# Altium PCB BQ76930.PcbDoc
Units mil, origin at the board's own origin, x right, y up, seen from the top; angles counter-clockwise.
Board outline 3267.72 x 2480.32 mil, 2 copper layers (Top Layer, Bottom Layer); 119 components, 71 nets, 383 pads, 169 vias.
Unrouted connection lines stored in the file: 2.
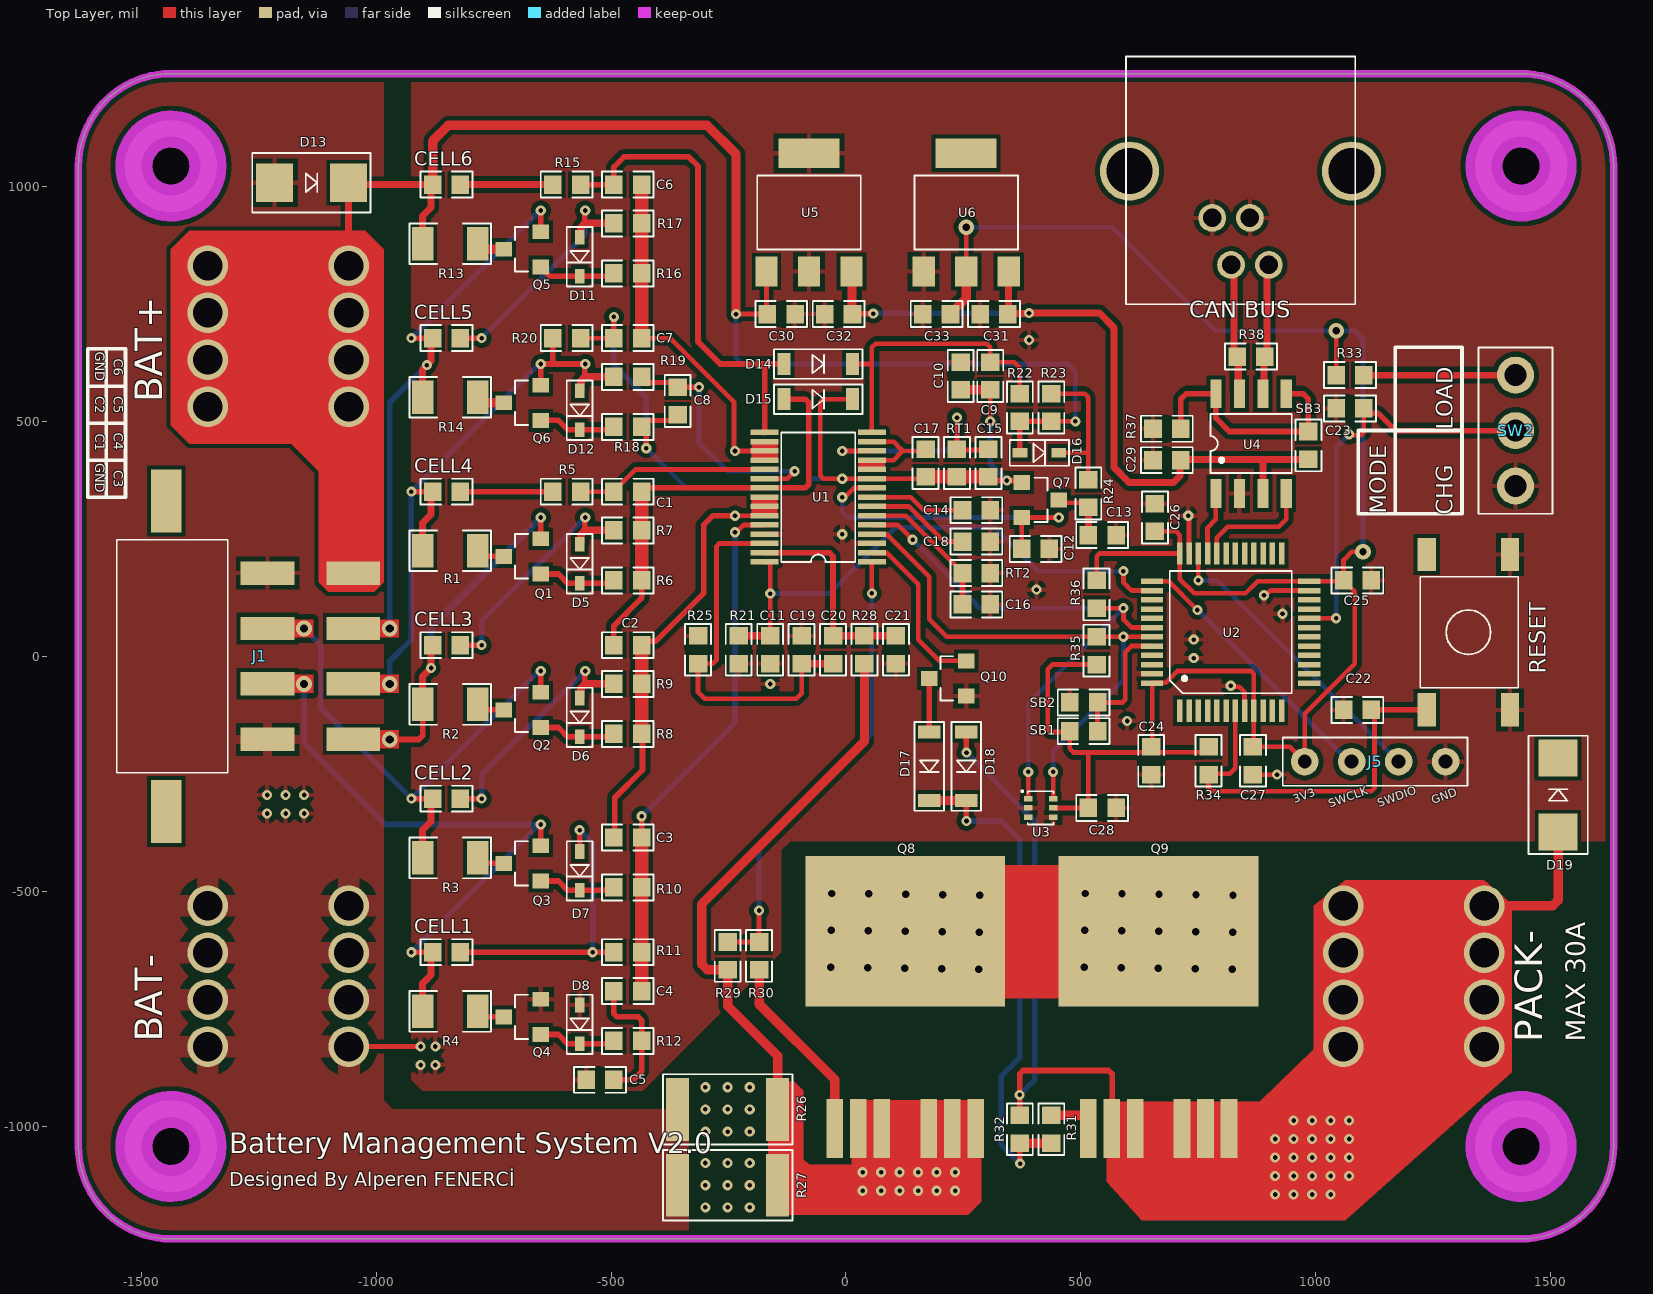
[diagram p0: Top Layer view]
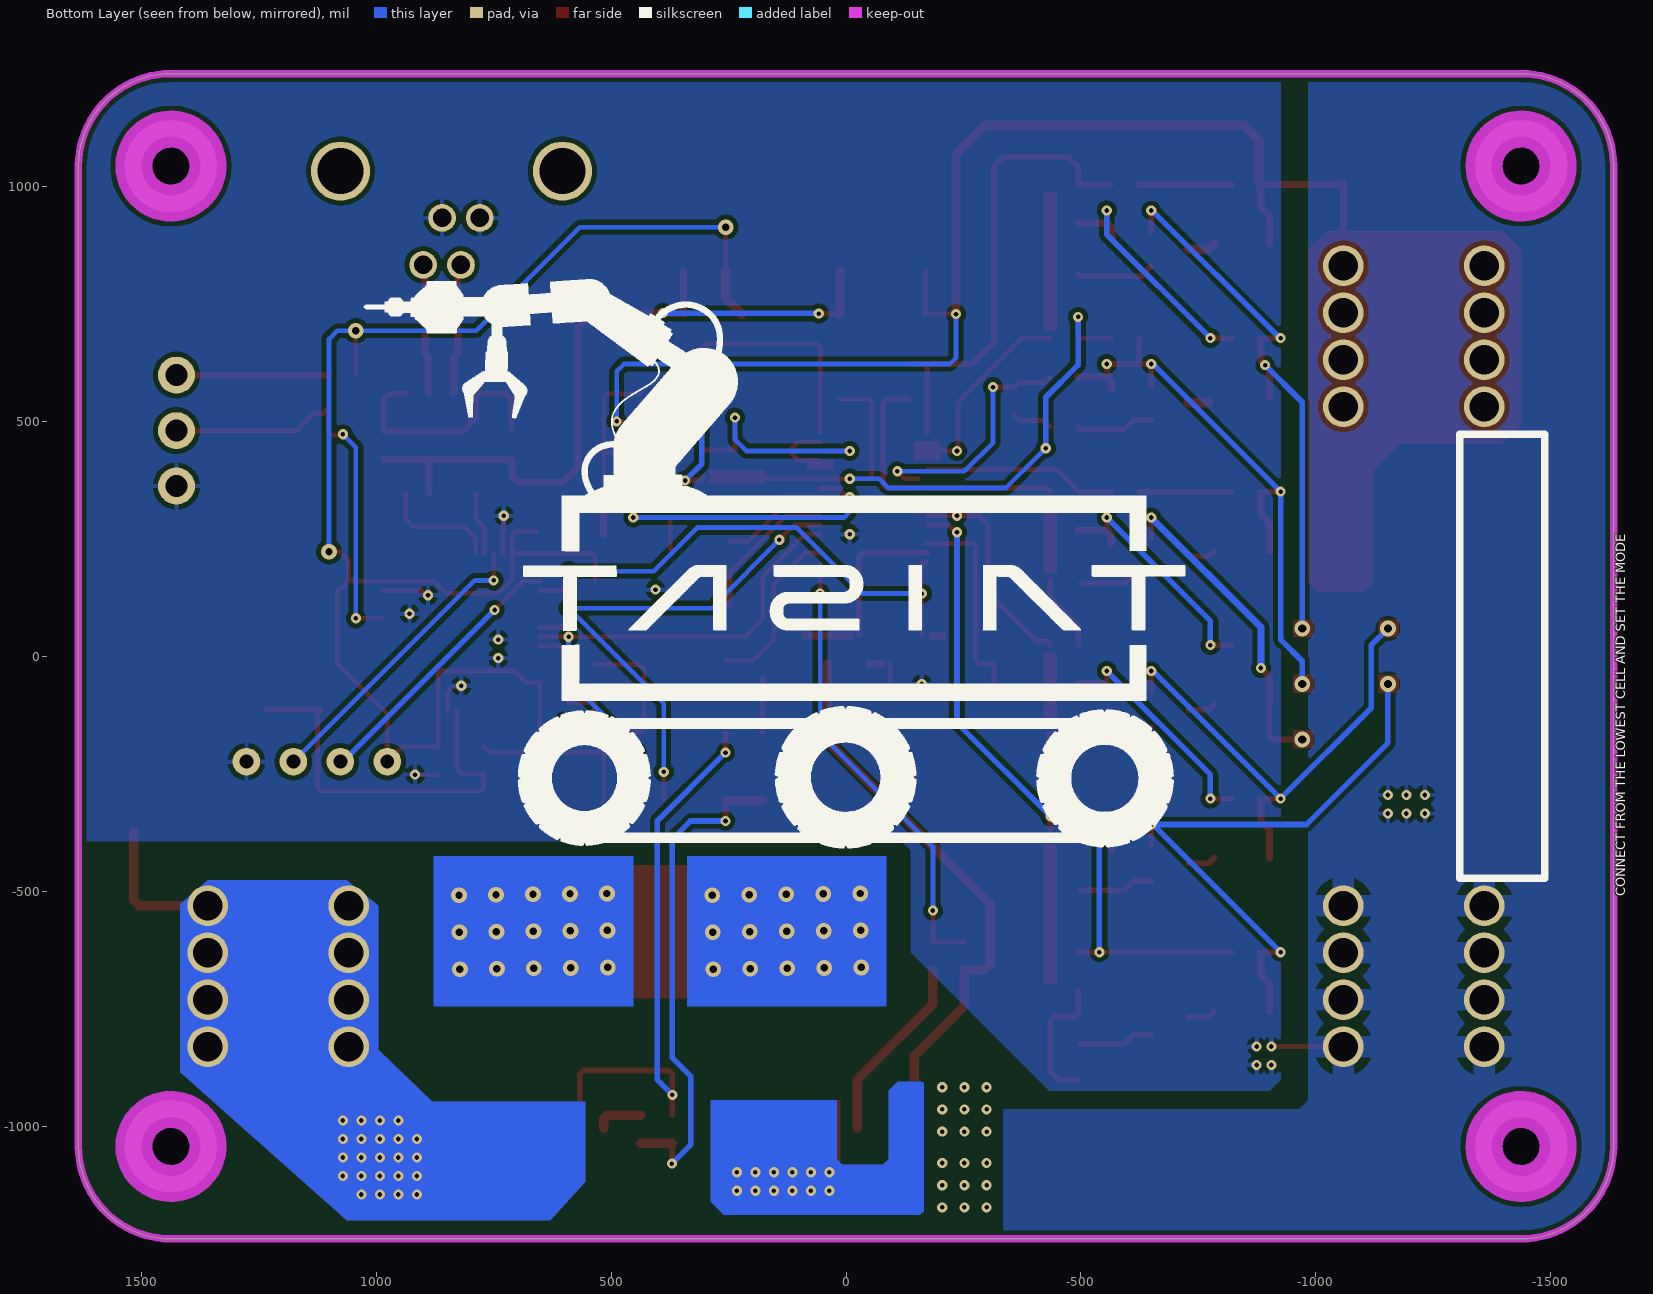
[diagram p1: Bottom Layer view, seen from below]
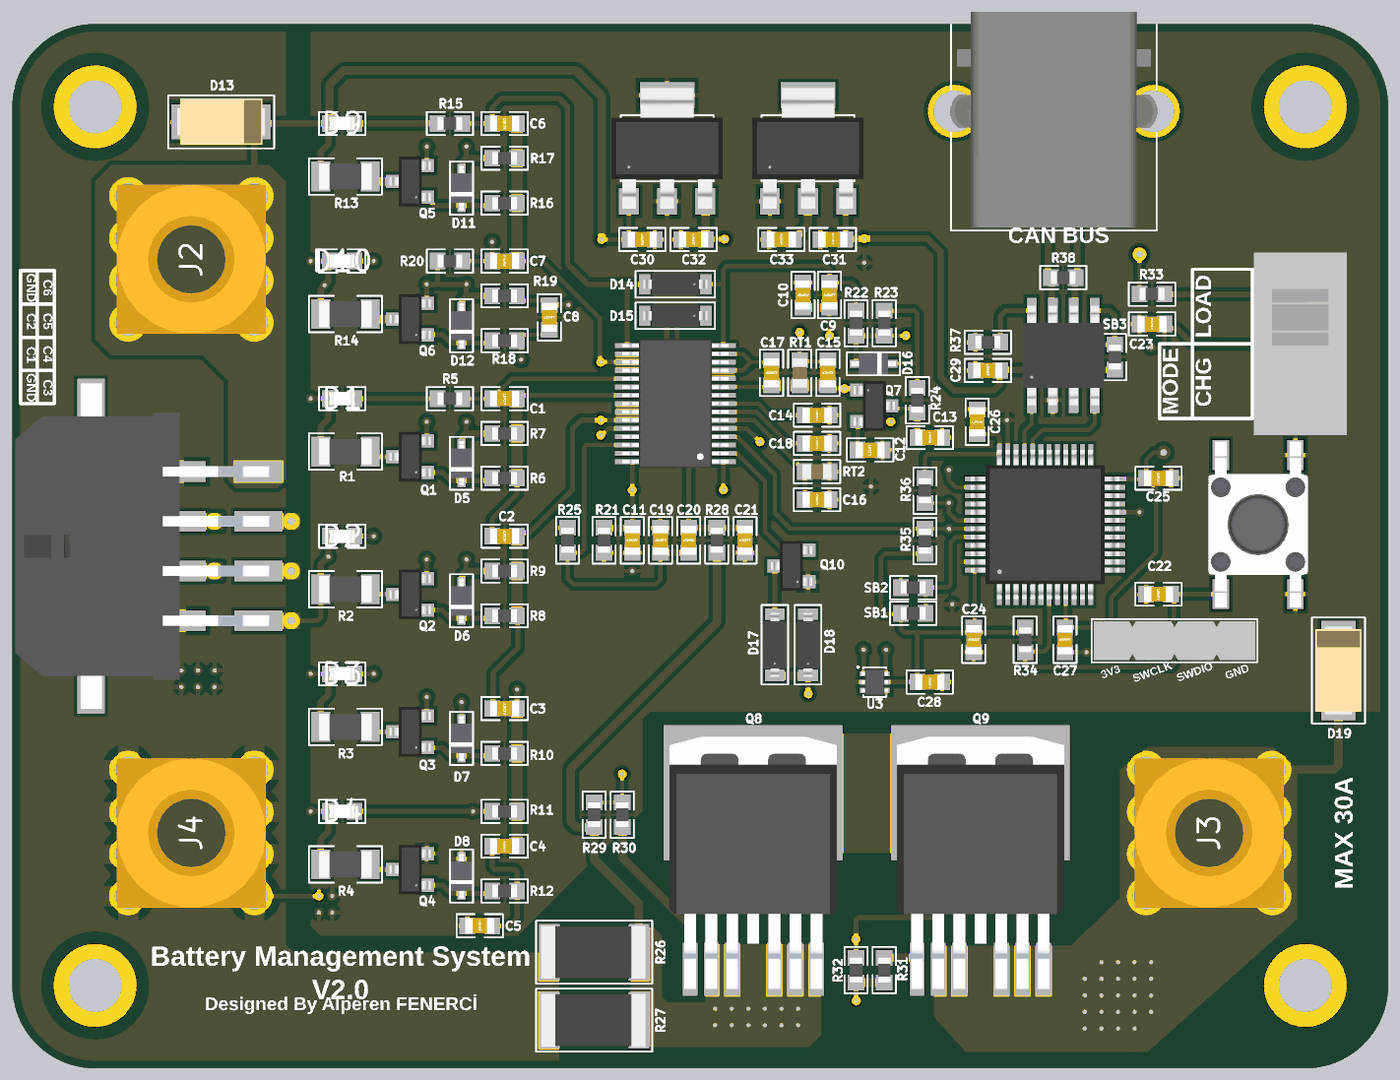
[diagram p2: 3D render of the assembled board from above, using the file's embedded part models]

## Layer stack, top to bottom
Top Solder: solder mask 0.4, Solder Resist, Dk 3.5
Top Layer: signal copper 1.4
Dielectric 1: dielectric 12.6, FR-4, Dk 4.8
Bottom Layer: signal copper 1.4
Bottom Solder: solder mask 0.4, Solder Resist, Dk 3.5

## Board outline
-1633.86,-1043.31 -1633.86,1043.31 cw(c-1437.01,1043.31) -1437.01,1240.16 1437.01,1240.16 cw(c1437.01,1043.31) 1633.86,1043.31 1633.86,-1043.31 cw(c1437.01,-1043.31) 1437.01,-1240.16 -1437.01,-1240.16 cw(c-1437.01,-1043.31)

## Design rules (kind name [scope] priority, off if disabled: settings)
Clearance [All] p1: gap=10 ignorepadtopadclearanceinfootprint=TRUE except(0: Arc-Hole Track-Hole SMDPad-Hole THPad-Hole Via-Hole Fill-Hole Poly-Hole Region-Hole Text-Hole; 8: Arc-Arc Arc-Track Arc-SMDPad Track-Track Track-SMDPad SMDPad-SMDPad SMDPad-Fill SMDPad-Poly SMDPad-Region)
DiffPairsRouting [All] p1: maxlimit=10 minlimit=10 mostfreqgap=10 toplayer_minwidth=15 toplayer_maxwidth=15 toplayer_prefwidth=15 bottomlayer_minwidth=15 bottomlayer_maxwidth=15 bottomlayer_prefwidth=15 maxuncoupledlength=500
PlaneConnect [All] p1: planeconnectstyle=Direct reliefexpansion=20 reliefentries=4 reliefconductorwidth=10 reliefairgap=10
PolygonConnect [All] p1: connectstyle=Relief reliefconductorwidth=10 reliefentries=4 polygonreliefangle="90 Angle" airgapwidth=10
RoutingVias [All] p1: holewidth=28 width=50 viastyle="Through Hole" minholewidth=28 minwidth=50 maxholewidth=28 maxwidth=50
SolderMaskExpansion [All] p1: expansion=4 istentingtop=FALSE
Width [All] p1: maxlimit=50 minlimit=10 preferedwidth=12 minimp=50.000000 maximp=50.000000 favimp=50.000000
28 further rules are at their usual default settings.

## Classes and differential pairs
component class TopLevel: BAT+ BAT- J1 PACK-
component class "Power Management": C29 C31 C33 U5 U6
component class FET: C19 C21 D15 D16 D19 Q7 Q9 R25 R26 R27 R28 R29 R30 R31
component class BMS: C1 C2 C3 C4 C5 C7 C9 C11 C13 C15 C17 CELL1 CELL2 CELL3 CELL4 CELL5 CELL6 D5 D6 D7 D8 D11 D13 D14 D15 Q1 Q2 Q3 Q4 R1 R2 R3 R4 R5 R6 R7 R8 R9 R10 R11 R12 R15 R19 R21 RT1 RT2 U1
component class Misc: C27 C29 "CAN BUS" R35 R37 SB3 U3 U4
component class MCU: C21 C23 C25 C27 J5 R31 R33 R35 RESET SB1 SB2 SW2 U2
differential pair CAN: +CAN_P -CAN_N

## Components (designator, comment, footprint, x,y, rotation, side; value= is the part's Value field where it differs from the comment)
BAT+ "7460305" 7460305 -1208.66,681.1 r90 top (schematic designator J2)
BAT- "7460305" 7460305 -1208.66,-681.1 r90 top (schematic designator J4)
C1 "CAP 0603" "CAP 0603" -464.57,350.39 r0 top value=10nF
C2 "CAP 0603" "CAP 0603" -464.57,23.62 r0 top value=10nF
C3 "CAP 0603" "CAP 0603" -464.57,-385.83 r0 top value=10nF
C4 "CAP 0603" "CAP 0603" -464.57,-712.6 r180 top value=10nF
C5 "CAP 0603" "CAP 0603" -523.62,-901.57 r180 top value=10nF
C6 "CAP 0603" "CAP 0603" -464.57,1003.94 r0 top value=10nF
C7 "CAP 0603" "CAP 0603" -464.57,677.17 r180 top value=10nF
C8 "CAP 0603" "CAP 0603" -358.27,543.31 r270 top value=10nF
C9 "CAP 0603" "CAP 0603" 307.09,596.46 r270 top value=10nF
C10 "CAP 0603" "CAP 0603" 244.09,596.46 r90 top value=10nF
C11 "CAP 0603" "CAP 0603" -161.42,13.78 r270 top value=10nF
C12 "CAP 0603" "CAP 0603" 403.54,228.35 r0 top value=10nF
C13 "CAP 0603" "CAP 0603" 545.28,257.87 r0 top value=10nF
C14 "CAP 0603" "CAP 0603" 277.56,311.02 r0 top value=10nF
C15 "CAP 0603" "CAP 0603" 303.15,411.42 r270 top value=10nF
C16 "CAP 0603" "CAP 0603" 277.56,110.24 r0 top value=10nF
C17 "CAP 0603" "CAP 0603" 169.29,411.42 r270 top value=10nF
C18 "CAP 0603" "CAP 0603" 277.56,244.1 r0 top value=10nF
C19 "CAP 0603" "CAP 0603" -94.49,13.78 r90 top value=10nF
C20 "CAP 0603" "CAP 0603" -27.56,13.78 r90 top value=10nF
C21 "CAP 0603" "CAP 0603" 106.3,13.78 r270 top value=10nF
C22 "CAP 0603" "CAP 0603" 1088.58,-114.17 r180 top value=10nF
C23 "CAP 0603" "CAP 0603" 1072.83,527.56 r180 top value=10nF
C24 "CAP 0603" "CAP 0603" 649.61,-222.44 r270 top value=10nF
C25 "CAP 0603" "CAP 0603" 1088.58,161.42 r0 top value=10nF
C26 "CAP 0603" "CAP 0603" 657.48,295.28 r90 top value=10nF
C27 "CAP 0603" "CAP 0603" 866.14,-222.44 r270 top value=10nF
C28 "CAP 0603" "CAP 0603" 545.28,-322.83 r0 top value=10nF
C29 "CAP 0603" "CAP 0603" 683.07,417.32 r180 top value=10nF
C30 "CAP 0603" "CAP 0603" -137.8,728.35 r0 top value=10nF
C31 "CAP 0603" "CAP 0603" 314.96,728.35 r180 top value=10nF
C32 "CAP 0603" "CAP 0603" -15.75,728.35 r180 top value=10nF
C33 "CAP 0603" "CAP 0603" 192.91,728.35 r180 top value=10nF
"CAN BUS" "DS1133-03-S60BX" RJ6P4C 839.76,883.07 r180 top (schematic designator RJ1)
CELL1 "LTW-C191TLA" "LED 0603" -850.39,-629.92 r180 top (schematic designator D4)
CELL2 "LTW-C191TLA" "LED 0603" -850.39,-303.15 r180 top (schematic designator D3)
CELL3 "LTW-C191TLA" "LED 0603" -850.39,23.62 r180 top (schematic designator D2)
CELL4 "LTW-C191TLA" "LED 0603" -850.39,350.39 r180 top (schematic designator D1)
CELL5 "LTW-C191TLA" "LED 0603" -850.39,677.17 r180 top (schematic designator D10)
CELL6 "LTW-C191TLA" "LED 0603" -850.39,1003.94 r180 top (schematic designator D9)
D5 "MM3Z5V1T1G" SOD323 -566.93,196.85 r90 top
D6 "MM3Z5V1T1G" SOD323 -566.93,-129.92 r90 top
D7 "MM3Z5V1T1G" SOD323 -566.93,-456.69 r90 top
D8 "MM3Z5V1T1G" SOD323 -566.93,-783.46 r90 top
D11 "MM3Z5V1T1G" SOD323 -566.93,850.39 r90 top
D12 "MM3Z5V1T1G" SOD323 -566.93,523.62 r90 top
D13 "SMAJ36A-HT" DO214AC -1137.8,1007.87 r180 top
D14 "BAV20W-7-F" SOD123 -59.06,622.05 r180 top
D15 "BAV20W-7-F" SOD123 -59.06,547.24 r180 top
D16 "1N4148WS" SOD323 411.42,433.07 r180 top
D17 "1N4007W" SOD123 177.17,-234.25 r90 top
D18 "MMSZ36V-HT" SOD123 255.91,-234.25 r90 top
D19 "US1D_R1" DO214AC 1515.75,-295.28 r270 top
J1 "HEADER-MALE-SMT-90C-4COL-2ROW" 0430450810 -1248.03,0 r270 top
J5 "146285-4" HMATHT00C41 1126.38,-224.41 r0 top
PACK- "7460305" 7460305 1208.66,-681.1 r90 top (schematic designator J3)
Q1 "2N7002K" SOT23-3 -688.98,212.6 r90 top
Q2 "2N7002K" SOT23-3 -688.98,-114.17 r90 top
Q3 "2N7002K" SOT23-3 -688.98,-440.94 r90 top
Q4 "2N7002K" SOT23-3 -688.98,-767.72 r90 top
Q5 "2N7002K" SOT23-3 -688.98,866.14 r90 top
Q6 "2N7002K" SOT23-3 -688.98,539.37 r90 top
Q7 "2N7002K" SOT23-3 413.39,332.68 r270 top
Q8 "IRF2804STRL" D2PAK-7 125.98,-795.28 r0 top
Q9 "IRF2804STRL" D2PAK-7 665.35,-795.28 r0 top
Q10 "PJA3441" SOT23-3 216.54,-47.24 r90 top
R1 "RES 1206" "RESISTOR 1206" -842.52,224.41 r180 top value=4.7kR
R2 "RES 1206" "RESISTOR 1206" -842.52,-102.36 r180 top value=4.7kR
R3 "RES 1206" "RESISTOR 1206" -842.52,-429.13 r180 top value=4.7kR
R4 "RES 1206" "RESISTOR 1206" -842.52,-755.9 r180 top value=4.7kR
R5 "RES 0603" "RESISTOR 0603" -594.49,350.39 r180 top value=1kR
R6 "RES 0603" "RESISTOR 0603" -464.57,161.42 r180 top value=1kR
R7 "RES 0603" "RESISTOR 0603" -464.57,267.72 r180 top value=1kR
R8 "RES 0603" "RESISTOR 0603" -464.57,-165.35 r180 top value=1kR
R9 "RES 0603" "RESISTOR 0603" -464.57,-59.05 r180 top value=1kR
R10 "RES 0603" "RESISTOR 0603" -464.57,-492.13 r180 top value=1kR
R11 "RES 0603" "RESISTOR 0603" -464.57,-629.92 r180 top value=1kR
R12 "RES 0603" "RESISTOR 0603" -464.57,-818.9 r180 top value=1kR
R13 "RES 1206" "RESISTOR 1206" -842.52,877.95 r180 top value=4.7kR
R14 "RES 1206" "RESISTOR 1206" -842.52,551.18 r180 top value=4.7kR
R15 "RES 0603" "RESISTOR 0603" -594.49,1003.94 r180 top value=1kR
R16 "RES 0603" "RESISTOR 0603" -464.57,814.96 r180 top value=1kR
R17 "RES 0603" "RESISTOR 0603" -464.57,921.26 r180 top value=1kR
R18 "RES 0603" "RESISTOR 0603" -464.57,488.19 r180 top value=1kR
R19 "RES 0603" "RESISTOR 0603" -464.57,594.49 r180 top value=1kR
R20 "RES 0603" "RESISTOR 0603" -594.49,677.17 r180 top value=1kR
R21 "RES 0603" "RESISTOR 0603" -228.35,13.78 r90 top value=1kR
R22 "RES 0603" "RESISTOR 0603" 370.08,529.53 r90 top value=1kR
R23 "RES 0603" "RESISTOR 0603" 437.01,529.53 r270 top value=1kR
R24 "RES 0603" "RESISTOR 0603" 515.75,346.46 r90 top value=1kR
R25 "RES 0603" "RESISTOR 0603" -314.96,13.78 r270 top value=1kR
R26 "RES 2512" "RESISTOR 2512" -251.97,-964.57 r0 top value=4.7kR
R27 "RES 2512" "RESISTOR 2512" -251.97,-1125.98 r0 top value=4.7kR
R28 "RES 0603" "RESISTOR 0603" 39.37,13.78 r90 top value=1kR
R29 "RES 0603" "RESISTOR 0603" -251.97,-637.8 r90 top value=1kR
R30 "RES 0603" "RESISTOR 0603" -185.04,-637.8 r90 top value=1kR
R31 "RES 0603" "RESISTOR 0603" 437.01,-1006.89 r270 top value=1kR
R32 "RES 0603" "RESISTOR 0603" 370.08,-1006.89 r270 top value=1kR
R33 "RES 0603" "RESISTOR 0603" 1072.83,598.43 r180 top value=1kR
R34 "RES 0603" "RESISTOR 0603" 771.65,-222.44 r90 top value=1kR
R35 "RES 0603" "RESISTOR 0603" 533.46,11.81 r270 top value=1kR
R36 "RES 0603" "RESISTOR 0603" 533.46,131.89 r90 top value=1kR
R37 "RES 0603" "RESISTOR 0603" 683.07,484.25 r0 top value=1kR
R38 "RES 0603" "RESISTOR 0603" 862.2,637.8 r0 top value=1kR
RESET "DS1042-03" SWITCH-6X6 1324.8,51.18 r90 top (schematic designator SW1)
RT1 "NTC 0603" "NTC 0603" 236.22,411.42 r90 top value=10kR
RT2 "NTC 0603" "NTC 0603" 277.56,177.17 r180 top value=10kR
SB1 "RES 0603" "RESISTOR 0603" 505.91,-159.45 r180 top value=1kR
SB2 "RES 0603" "RESISTOR 0603" 505.91,-98.43 r0 top value=1kR
SB3 "RES 0603" "RESISTOR 0603" 984.25,448.82 r270 top value=1kR
SW2 "L-KLS7-SS-12F20A" SPDT 1425.2,480.32 r270 top
U1 "BQ76930" TSSOP-30 -59.06,338.58 r180 top
U2 "STM32F072C8" LQFP48 818.9,51.18 r0 top
U3 "TMP112AIDRLT" SOT563 414.37,-322.83 r0 top
U4 "MCP2551T-I" SOIC-8 862.2,452.76 r90 top
U5 "LM7805MPX" SOT223-3 -78.74,944.88 r0 top
U6 "LD1117AS33" SOT223-3 255.91,944.88 r0 top

## Footprints (in the part's own frame and the unit in brackets; to place one, negate y for a bottom-side part, rotate by r counter-clockwise, add the part's x,y. Pads: shape width x height; smd on the part's side, far side on the other; paste and mask are expansions set on the pad)
7460305 [mm]
  round 2.2 hole 1.6 mask+0.05: 1(-3.81,-3.81) 1(-3.81,3.81) 1(-1.27,3.81) 1(-1.27,-3.81) 1(1.27,3.81) 1(1.27,-3.81) 1(3.81,-3.81) 1(3.81,3.81)
  body extent -4.5,-4.5 4.5,4.5, height 7
0430450810 [mm]
  rect 1.27x2.9 smd mask+0.05: 1(-4.5,5.055) 2(-1.5,5.055) 3(1.5,5.055) 4(4.5,5.055) 5(-4.5,0.425) 6(-1.5,0.425) 7(1.5,0.425) 8(4.5,0.425)
  rect 3.4x1.65 smd mask+0.05: ""(-8.4,-5.055) ""(8.4,-5.055)
  silkscreen extent -6.3,-7.73 6.3,-1.73, body extent -9.82,-9.62 9.82,5.77, height 8.77
"CAP 0603" [mm]
  rect 0.95x1 smd mask+0.05: 1(-0.75,0) 2(0.75,0)
  silkscreen extent -1.4,-0.7 1.4,0.7, body extent -0.88,-0.47 0.88,0.48, height 0.95
D2PAK-7 [mm] "TO-263-7"
  rect 0.9x3.2 smd mask+0.05: 1(-3.81,-5.325) 2(-2.54,-5.325) 2(-1.27,-5.325) 2(1.27,-5.325) 2(2.54,-5.325) 2(3.81,-5.325)
  rect 10.8x8.15 smd mask+0.05: 3(0,5.325)
  body extent -5.05,-6.54 5.05,8.7, height 4.88
DO214AC [mm] "SMA"
  rect 2x2.1 smd mask+0.05: 1(-2,0) 2(2,0)
  silkscreen extent -3.2,-1.6 3.2,1.6, body extent -2.64,-1.4 2.64,1.4, height 2.34
HMATHT00C41 [mm]
  round 1.5 hole 0.75 mask+0.05: 1(-3.81,0) 2(-1.27,0) 3(1.27,0) 4(3.81,0)
  silkscreen extent -5,-1.3 5,1.3, body extent -4.88,-1.17 4.88,1.17, height 4.58
"LED 0603" [mm]
  rect 0.95x1 smd mask+0.05: 1(-0.75,0) 2(0.75,0)
  silkscreen extent -1.4,-0.7 1.4,0.7, body extent -0.8,-0.4 0.8,0.4, height 0.65
LQFP48 [mm]
  rect 0.3x1.2 smd mask+0.05: 1(-2.75,-4.25) 2(-2.25,-4.25) 3(-1.75,-4.25) 4(-1.25,-4.25) 5(-0.75,-4.25) 6(-0.25,-4.25) 7(0.25,-4.25) 8(0.75,-4.25) 9(1.25,-4.25) 10(1.75,-4.25) 11(2.25,-4.25) 12(2.75,-4.25) 25(2.75,4.25) 26(2.25,4.25) 27(1.75,4.25) 28(1.25,4.25) 29(0.75,4.25) 30(0.25,4.25) 31(-0.25,4.25) 32(-0.75,4.25) 33(-1.25,4.25) 34(-1.75,4.25) 35(-2.25,4.25) 36(-2.75,4.25)
  rect 1.2x0.3 smd mask+0.05: 13(4.25,-2.75) 14(4.25,-2.25) 15(4.25,-1.75) 16(4.25,-1.25) 17(4.25,-0.75) 18(4.25,-0.25) 19(4.25,0.25) 20(4.25,0.75) 21(4.25,1.25) 22(4.25,1.75) 23(4.25,2.25) 24(4.25,2.75) 37(-4.25,2.75) 38(-4.25,2.25) 39(-4.25,1.75) 40(-4.25,1.25) 41(-4.25,0.75) 42(-4.25,0.25) 43(-4.25,-0.25) 44(-4.25,-0.75) 45(-4.25,-1.25) 46(-4.25,-1.75) 47(-4.25,-2.25) 48(-4.25,-2.75)
  silkscreen extent -3.3,-3.3 3.3,3.3, body extent -4.5,-4.5 4.5,4.5, height 1.6
"NTC 0603" [mm]
  rect 0.95x1 smd mask+0.05: 1(-0.75,0) 2(0.75,0)
  silkscreen extent -1.4,-0.7 1.4,0.7, body extent -0.88,-0.44 0.88,0.44, height 0.89
"RESISTOR 0603" [mm]
  rect 0.95x1 smd mask+0.05: 1(-0.75,0) 2(0.75,0)
  silkscreen extent -1.4,-0.7 1.4,0.7, body extent -0.76,-0.38 0.76,0.38, height 0.36
"RESISTOR 1206" [mm]
  rect 1.15x1.8 smd mask+0.05: 1(-1.49,0) 2(1.49,0)
  silkscreen extent -2.2,-1.1 2.2,1.1, body extent -1.6,-0.8 1.6,0.8, height 0.64
"RESISTOR 2512" [mm]
  rect 1.25x3.4 smd mask+0.05: 1(-2.7,0) 2(2.7,0)
  silkscreen extent -3.5,-1.9 3.5,1.9, body extent -3.2,-1.6 3.1,1.6, height 0.71
RJ6P4C [mm]
  round 1.5 hole 1 mask+0.05: 1(-1.53,1.27) 2(-0.51,-1.27) 3(0.51,1.27) 4(1.53,-1.27)
  round 3.2 hole 2.5 mask+0.05: ""(-6,-3.8) ""(6,-3.8)
  silkscreen extent -6.2,-10 6.2,3.4, body extent -6.24,-9.8 6.24,3.2, height 14.5
SOD123 [mm]
  rect 0.7x1.2 smd mask+0.05: 1(-1.85,0) 2(1.85,0)
  silkscreen extent -2.4,-0.8 2.4,0.8, body extent -1.92,-0.67 1.92,0.67, height 0.81
SOD323 [mm]
  rect 0.8x0.5 smd mask+0.05: 1(-1.05,0) 2(1.05,0)
  silkscreen extent -1.6,-0.7 1.6,0.7, body extent -1.34,-0.65 1.34,0.65, height 0.94
SOIC-8 [mm]
  rect 1.55x0.6 smd mask+0.05: 1(-2.7,1.905) 2(-2.7,0.635) 3(-2.7,-0.635) 4(-2.7,-1.905) 5(2.7,-1.905) 6(2.7,-0.635) 7(2.7,0.635) 8(2.7,1.905)
  silkscreen extent -1.6,-2.2 1.6,2.2, body extent -3,-2.45 3,2.45, height 1.76
SOT23-3 [mm]
  rect 0.8x0.9 smd mask+0.05: 1(-0.95,-1) 2(0.95,-1) 3(0,1)
  silkscreen extent -1.2,-0.3 1.2,0.4, body extent -1.5,-1.24 1.5,1.24, height 1.17
SOT223-3 [mm]
  rect 1.2x1.6 smd mask+0.05: 1(-2.3,-3.2) 2(0,-3.2) 3(2.3,-3.2)
  rect 3.3x1.6 smd mask+0.05: 2(0,3.2)
  silkscreen extent -2.8,-2 2.8,2, body extent -3.35,-3.64 3.35,3.64, height 1.81
SOT563 [mm]
  rect 0.45x0.3 smd mask+0.05: 1(-0.675,0.5) 2(-0.675,0) 3(-0.675,-0.5) 4(0.675,-0.5) 5(0.675,0) 6(0.675,0.5)
  silkscreen extent -1.05,-0.9 0.7,0.95, body extent -0.8,-0.8 0.8,0.8, height 0.6
SPDT [mm]
  round 2 hole 1.2: 1(-3,0) 2(0,0) 3(3,0)
  silkscreen extent -4.5,-2 4.5,2, body extent -5.5,-2.79 5.5,2.79, height 9.95
SWITCH-6X6 [mm]
  rect 1.8x1 smd: 1(-4.2,2.25) 1(4.2,2.25) 2(-4.2,-2.25) 2(4.2,-2.25)
  silkscreen extent -3,-2.7 3,2.6, body extent -5,-3 5,3, height 4.3
TSSOP-30 [mm]
  rrect5% 1.5x0.3 smd mask+0.05: 1(-2.9,3.5) 2(-2.9,3) 3(-2.9,2.5) 4(-2.9,2) 5(-2.9,1.5) 6(-2.9,1) 7(-2.9,0.5) 8(-2.9,0) 9(-2.9,-0.5) 10(-2.9,-1) 11(-2.9,-1.5) 12(-2.9,-2) 13(-2.9,-2.5) 14(-2.9,-3) 15(-2.9,-3.5) 16(2.9,-3.5) 17(2.9,-3) 18(2.9,-2.5) 19(2.9,-2) 20(2.9,-1.5) 21(2.9,-1) 22(2.9,-0.5) 23(2.9,0) 24(2.9,0.5) 25(2.9,1) 26(2.9,1.5) 27(2.9,2) 28(2.9,2.5) 29(2.9,3) 30(2.9,3.5)
  silkscreen extent -2,-3.5 2,3.5, body extent -3.2,-3.9 3.2,3.9, height 1.2

## Part data
BAT+ BAT- PACK-: "Connector"
C1 C2 C3 C4 C5 C6 C7 C8 C9 C10 C11 C12 C13 C14 C15 C16 C17 C18 C19 C20 C21 C22 C23 C24 C25 C26 C27 C28 C29 C30 C31 C32 C33: "Multilayer Ceramic Capacitor", Capacitor Type=MLCC, Case/Package=0603
"CAN BUS": library part RJ11, "RJ11 Jack", Positions/Contacts=6P/4C, RJ Type=RJ11
CELL1 CELL2 CELL3 CELL4 CELL5 CELL6: library part "LED 0603", "Chip LED", Case/Package=0603
D5 D6 D7 D8 D11 D12: "Diode Zener", Case/Package=SOD323, Voltage=5.1V, ComponentLink1Description=Ozdisan, ComponentLink1URL=https://ozdisan.com/power-semiconductors/diodes-diode-modules-and-rectifiers/zener-diodes/MM3Z5V1T1G/611730, Diode Type=Zener
D13: "Diode TVS", Case/Package=DO214, Voltage=36V, Diode Type=TVS
D14 D15: "Diode Switch", Case/Package=SOD123, Voltage=150V, Diode Type=Switch
D16: "Diode Gen", Case/Package=DO-41-2, Voltage=75V, ComponentLink1Description=Ozdisan, ComponentLink1URL=https://ozdisan.com/power-semiconductors/diodes-diode-modules-and-rectifiers/general-purpose-diodes/1N4148WS-HT/453557, Diode Type=General
D17: "Diode Gen", Case/Package=DO-41-2, Voltage=1000V, Diode Type=General
D18: "Diode Zener", Case/Package=SOD123, Voltage=36V, Diode Type=Zener
D19: "Diode Gen", Case/Package=DO-214AC, Voltage=200V, Diode Type=General
J1: library part 0430450810, "Connector", Case/Package=SMD, ComponentLink1Description=Digikey, ComponentLink1URL=https://www.digikey.com/en/products/detail/molex/0430450810/2404815?s=N4IgTCBcDaIAwBYDMiCscAcBGOIC6AvkA, ComponentLink2Description=Ozdisan, ComponentLink2URL=https://ozdisan.com/connectors-and-interconnects/rectangular-connectors/pcb-connectors/L-KLS1-XM1-3-00-2X04-RT/512932, ComponentLink3Description=Datasheet, ComponentLink3URL=https://www.molex.com/en-us/products/part-detail/430450810?display=pdf, ComponentLink4Description=Datasheet, ComponentLink4URL=https://cdn.ozdisan.com/ETicaret_Dosya/482201_886496495..pdf, Contact Type=Male, Pin Positions=8, Pin Rows=2
J5: library part HMATHT00C41, "Header for PCB"
Q1 Q2 Q3 Q4 Q5 Q6 Q7: "MOSFET", Case/Package=SOT23, Current=300mA, Voltage=60V, Transistor Type=N-CH
Q8 Q9: "MOSFET", Case/Package=TO263-7, Current=160A, Voltage=40V, Transistor Type=N-CH
Q10: "MOSFET", Case/Package=SOT23, Current=3.1A, Voltage=40V, Transistor Type=P-CH
R1 R2 R3 R4 R13 R14 R26 R27: "SMD Chip Resistor", Case/Package=1206
R5 R6 R7 R8 R9 R10 R11 R12 R15 R16 R17 R18 R19 R20 R21 R22 R23 R24 R25 R28 R29 R30 R31 R32 R33 R34 R35 R36 R37 R38 SB1 SB2 SB3: "SMD Chip Resistor", Case/Package=0603
RESET SW2: "Switch"
RT1 RT2: "Thermistor NTC", Case/Package=0603
U1: "Cell Balance, Cell Monitoring", Case/Package=TSSOP, Category=PMIC
U2: "STM32 ARM Cortex M0", Case/Package=LQFP, Category=MCU, Pins=48
U3: "Temp Sensor", Package/Case=SOT563, Category=Sensor
U4: "CAN Transceiver", Case/Package=SOIC-8, Category="Interface IC"
U5: "Regulator Linear"
U6: "Regulator Linear", Case/Package=SOT223, Category="Linear Regulator", ComponentLink1Description=Ozdisan, ComponentLink2Description=Datasheet

## Free pads (board coordinates)
  round 196.85 hole 125.98 mask+1.97: ""(-1437.01,-1043.31) ""(-1437.01,1043.31) ""(1437.01,-1043.31) ""(1437.01,1043.31)

## Via types
v1: diameter 21.65, hole 9.84, Top Layer to Bottom Layer, 131 vias
v2: diameter 33.46, hole 15.75, Top Layer to Bottom Layer, 33 vias
v3: diameter 33.46, hole 17.72, Top Layer to Bottom Layer, 5 vias

## Nets (pads, with @x,y where several pads share a name; then routed paths per layer and width w, separated by ;. In a path a pad name is that pad's centre, name@x,y a point inside that pad or via, vN(x,y) a via of type N, cw(c..) or ccw(c..) an arc to the next point about the centre after c; other vN are vias at no path point)
3V3: C24.1 C25.1 C26.1 C27.1 C28.1 C33.1 J5.1 R33.2 R34.2 R35.2 R36.2 SB1.2 U2.9 U2.24 U2.36 U2.48 U3.5 U6.2 | length 4449.5
  Top Layer w10: U6.2@255.91,818.9 v2(255.91,913.39) ; U3.5 C28.1 515.75,-205.57 514.9,-204.72 ; R35.2 438.98,-17.72 429.13,-27.56 429.13,-155.56 434.99,-161.42 474.41,-161.42 SB1.2 476.38,-196.85 484.25,-204.72 514.9,-204.72 ; R36.2 533.46,212.65 539.32,218.5 U2.36 ; C24.1 651.57,-190.95 U2.48 652.35,-56.31 680.58,-56.31 705.39,-31.5 862.25,-31.5 868.11,-37.35 U2.9 868.11,-190.94 C27.1 944.88,-192.91 J5.1 976.38,-122.05 1082.68,-15.75 1082.68,137.8 1073.74,146.73 1072.76,146.73 1059.06,160.43 C25.1 1059.06,204.72 1076.77,222.44 v2(1100.39,222.44) ; C26.1 702.76,265.75 710.63,257.87 U2.36 ; R34.2@771.65,-190.94 757.95,-204.65 620.65,-204.65 620.57,-204.72 514.9,-204.72 ; R33.2 v2(1043.31,692.91) ; C25.1@1045.35,167.24 1051.18,161.42 C25.1@1058.07,161.42 ; C25.1@1051.18,159.45 U2.24 875.98,159.45 850.39,133.86 741.03,133.86 710.63,164.26 U2.36
  Top Layer w20: C33.1 222.44,729.33 243.21,750.1 244.19,750.1 255.91,761.81 U6.2@255.91,818.9
  Bottom Layer w10: v2(255.91,913.39) 566.93,913.39 787.4,692.91 v2(1043.31,692.91) 1082.68,692.91 1100.39,675.2 v2(1100.39,222.44)
5V: C29.1 C31.1 C32.1 SB3.2 U4.3 U5.3 U6.3 | length 1629.9
  Top Layer w12: C32.1@14.27,728.84 v1@57.42,728.84
  Top Layer w15: C31.1 345.47,729.33 345.47,817.91 U6.3 ; C31.1@345.96,729.82 v1@389.11,729.82 ; v1(389.6,730.32) 539.47,730.32 570.87,698.91 570.87,401.57 602.36,370.08 696.85,370.08 710.7,383.92 710.7,415.42 713.58,418.31 887.25,418.31 ; U4.3 887.2,418.26 887.25,418.31 ; SB3.2 983.27,418.31 887.25,418.31
  Top Layer w20: U5.3 12.79,817.91 12.79,729.33 C32.1
  Bottom Layer w12: v1(57.91,729.33) 58.4,729.82 389.11,729.82 v1(389.6,730.32)
CAN_N: "CAN BUS.1" R38.2 U4.6 | length 279.3
  Top Layer w15: U4.6 889.47,561.32 889.47,635.53 R38.2 895.87,641.93 895.87,828.94 900,833.07
CAN_P: "CAN BUS.3" R38.1 U4.7 | length 281.3
  Top Layer w15: 819.68,833.07 826.18,826.57 826.18,644.29 R38.1 834.94,635.53 834.94,561.32 U4.7
GND: "CAN BUS.2" "CAN BUS.4" BAT-.1 C5.2 C10.2 C11.2 C12.2 C13.2 C14.2 C16.2 C18.2 C19.2 C21.2 C22.2 C23.2 C24.2 C25.2 C26.2 C27.2 C28.2 C29.2 C30.2 C31.2 C32.2 C33.2 D8.2 D13.2 J1.5 J1.8 J5.4 Q4.2 Q10.1 R21.1 R25.1 R26.1 R27.1 R37.1 RESET.2 RT2.1 SB2.1 SW2.3 U1.3 U1.27 U2.8 U2.23 U2.35 U2.47 U3.2 U3.4 U4.2 U5.2 U6.1 | length 461.2
  Top Layer w10: BAT-.1@-1058.66,-831.1 -1058.46,-830.91 -905.71,-830.91 v1(-905.51,-830.71) ; v1(728.35,299.21) 730.31,297.24 U2.35 ; v1(818.9,-62.99) 821.13,-65.22 836.88,-65.22 848.43,-76.77 U2.8 ; C27.2 v1(917.32,-251.97) ; v1(889.76,129.92) 892.92,129.92 902.76,139.76 U2.23
  other v1: -905.51,-870.08 -874.02,-870.08 -874.02,-830.71 -1232.28,-334.65 -1192.91,-334.65 -1153.54,-334.65 -1232.28,-295.28 -1192.91,-295.28 -1153.54,-295.28 598.43,-137.8 -161.42,-59.06 740.16,-3.94 740.16,35.43 929.13,90.55 405.51,141.73 -7.87,259.84 389.76,673.23
NetC1_1: C1.1 R5.1 U1.20 | length 411.9
  Top Layer w10: R5.1 C1.1 -494.09,351.38 -447.83,397.64 U1.20
NetC1_2: C1.2 C2.1 D15.2 R6.1 R7.1 U1.22 | length 730.7
  Top Layer w12: C2.1 -494.09,64.96 -435.04,124.02 R6.1 ; C1.2 -427.16,358.27 U1.22 ; U1.22@-149.7,358.27 -86.5,358.27 -79.47,365.3 -79.47,540.21 -86.5,547.24 D15.2
NetC2_2: C2.2 C3.1 R8.1 R9.1 U1.23 U1.24 U1.25 | length 702.3
  Top Layer w10: v1(-236.22,299.21) U1.25
  Top Layer w12: C3.1@-492.13,-381.89 -492.13,-301.18 -433.07,-242.13 R8.1@-433.07,-165.35 ; C2.2 -427.02,31.64 -405.37,31.64 -303.15,133.86 -303.15,279.53 -283.46,299.21 v1(-236.22,299.21)
NetC3_2: C3.2 C4.1 R10.1 R11.1 U1.26 | length 801.5
  Top Layer w10: v1(-236.22,263.78) -233.71,263.78 -217.97,279.53 U1.26
  Top Layer w12: C3.2 v1(-435.04,-340.55)
  Bottom Layer w12: v1(-435.04,-340.55) -236.22,-141.73 v1(-236.22,263.78)
NetC4_2: C4.2 C5.1 R12.1 | length 288.5
  Top Layer w12: C5.1 -452.76,-901.57 -435.04,-883.86 R12.1 -435.04,-774.75 -442.07,-767.72 -487.06,-767.72 -494.09,-760.69 C4.2
NetC6_1: C6.1 D14.2 R15.1 U1.16 | length 1026.8
  Top Layer w12: R15.1 C6.1 -494.09,1041.34 -472.44,1062.99 -334.65,1062.99 -314.96,1043.31 -314.96,669.29 -267.72,622.05 -173.23,622.05 ; U1.16 -173.23,622.05 ; D14.2 -173.23,622.05
NetC6_2: C6.2 C7.1 R16.1 R17.1 U1.17 U1.18 U1.19 | length 421.2
  Top Layer w10: C7.1 -374.02,677.17 -238.45,541.6 -238.45,439.24 v1(-236.22,437.01) U1.18
NetC7_2: C7.2 C8.2 C9.2 C10.1 C15.2 C17.2 D15.1 Q7.1 R18.1 R20.1 RT1.1 U1.10 | length 1815.9
  Top Layer w10: R20.1 C7.2 ; R18.1 -435.04,488.3 -421.34,502 -370.05,502 C8.2 ; D15.1 -48.09,547.24 -55.12,540.22 -55.12,384.98 -48.09,377.95 165.35,377.95 C17.2 ; v1(307.09,500) C9.2@307.09,562.99
  Top Layer w12: C7.2 v1(-494.09,722.44) ; v1(-425.2,442.91) R18.1@-425.2,488.19 ; C15.2 311.02,374.02 v1(342.52,374.02) 370.08,374.02 Q7.1
  Top Layer w20: C10.1 C9.2
  Bottom Layer w10: v1(-425.2,442.91) -340.55,358.27 -90.16,358.27 -70.47,377.95 v1(-7.87,377.95)
  Bottom Layer w12: v1(-494.09,722.44) -494.09,620.08 -425.2,551.18 v1(-425.2,442.91) ; v1(307.09,500) 307.09,409.45 v1(342.52,374.02)
NetC8_1: C8.1 R19.1 U1.21 | length 528.6
  Top Layer w10: R19.1 -423.23,582.68 -368.11,582.68 C8.1 ; U1.21@-153.54,377.95 -125.2,377.95 v1(-109.45,393.7)
  Top Layer w12: C8.1 v1(-312.99,572.84)
  Bottom Layer w10: v1(-312.99,572.84) -312.99,454.72 -251.97,393.7 v1(-109.45,393.7)
NetC9_1: C9.1 D14.1 R22.2 U1.15 | length 635.5
  Top Layer w10: D14.1 55.12,622.05 ; U1.15 55.12,622.05 ; R22.2 370.08,614.27 358.36,625.98 C9.1 307.09,657.48 299.21,665.35 62.99,665.35 55.12,657.48 55.12,622.05
NetC11_1: C11.1 R21.2 U1.30 U2.38 | length 1109.3
  Top Layer w10: U1.30 -162.32,200.79 -161.42,199.88 C11.1 ; v1(590.55,181.1) 590.55,157.48 608.27,139.76 U2.38
  Bottom Layer w10: v1(-161.42,133.38) -35.92,133.38 104.57,273.86 316.69,273.86 409.45,181.1 v1(590.55,181.1)
NetC12_1: C12.1 Q7.2 U1.9 | length 713.8
  Top Layer w10: v1(-7.87,338.58) -5.64,340.81 -0.25,340.81 17.2,358.27 U1.9 ; C12.1 Q7.2 v1(452.76,295.28)
  Bottom Layer w10: v1(-7.87,338.58) -7.87,307.09 3.94,295.28 v1(452.76,295.28)
NetC13_1: C13.1 Q7.3 R24.1 | length 128.6
  Top Layer w10: Q7.3 458.66,326.77 505.91,326.77 R24.1
  Top Layer w15: C13.1 R24.1
NetC14_1: C14.1 U1.8 | length 204.3
  Top Layer w10: U1.8 137.8,338.58 165.35,311.02 C14.1
NetC15_1: C15.1 RT1.2 U1.13 | length 498.8
  Top Layer w10: v1(-7.87,437.01) U1.13 ; RT1.2@236.22,438.98 301.18,438.98 C15.1 ; RT1.2 v1(236.22,507.87)
  Bottom Layer w10: v1(-7.87,437.01) 212.6,437.01 236.22,460.63 v1(236.22,507.87)
NetC16_1: C16.1 RT2.2 U1.6 | length 311
  Top Layer w10: U1.6 127.08,299.21 193.38,232.91 193.38,232.8 248.03,178.15 RT2.2
  Top Layer w12: C16.1 RT2.2
NetC17_1: C17.1 U1.11 U1.12 U1.14 | length 144.7
  Top Layer w10: U1.12 101.28,417.32 117.02,433.07 117.02,440.94 101.28,456.69 U1.14
NetC18_1: C18.1 U1.7 | length 223.9
  Top Layer w10: U1.7 133.86,318.9 208.66,244.1 C18.1
NetC19_1: C19.1 C20.1 R25.2 U1.28 | length 744.7
  Top Layer w10: U1.28 -269.73,240.16 -275.59,234.3 -275.59,-7.87 -283.46,-15.75 R25.2 -314.96,-76.75 -301.16,-90.55 -106.3,-90.55 -94.49,-78.74 C19.1
NetC20_2: C20.2 C21.1 R28.2 U1.29 | length 318.2
  Top Layer w12: U1.29 -173.13,220.38 -35.34,220.38 -27.56,212.6 C20.2
NetC22_1: C22.1 R34.1 RESET.1 U2.7 | length 861.5
  Top Layer w10: U2.7 828.74,-238.24 816.98,-250 771.65,-250 771.65,-281.54 777.51,-287.4 1118.11,-287.4 1124.96,-280.56 1124.96,-121.02 C22.1
  Top Layer w12: C22.1 RESET.1@1236.22,-114.17
NetC23_1: C23.1 SW2.2 U2.20 | length 888.6
  Top Layer w10: U2.20 v1(1043.31,80.71) ; v1(1070.87,472.44) 1072.83,470.47 1096.5,470.47 1102.36,476.33 C23.1
  Top Layer w12: C23.1 1112.35,517.57 1132.03,517.57 1169.29,480.32 SW2.2
  Bottom Layer w10: v1(1043.31,80.71) 1043.31,444.88 v1(1070.87,472.44)
NetC30_1: BAT+.1 C30.1 CELL6.2 D13.1 D16.2 J1.1 R13.2 R22.1 R23.2 U5.1 | length 2832.3
  Top Layer w10: v1(-234.25,728.35) C30.1 -169.29,730.32 U5.1 ; R23.2 v1(488.19,500)
  Top Layer w12: D16.2 R22.1 R23.2
  Top Layer w15: -1059.06,885.83 D13.1 -1055.12,1003.94 CELL6.2 -883.22,1000.64 -883.22,955.36 -901.18,937.4 R13.2
  Top Layer w20: CELL6.2 -879.92,1096.46 -846.46,1129.92 -295.28,1129.92 -234.25,1068.9 v1(-234.25,728.35)
  Bottom Layer w10: v1(-234.25,728.35) -234.25,635.83 -220.47,622.05 472.44,622.05 488.19,606.3 v1(488.19,500)
NetD1_1: CELL4.1 R5.2 | length 196.9
  Top Layer w12: CELL4.1 R5.2
NetD1_2: CELL4.2 D12.2 J1.3 Q6.2 R1.2 R19.2 R20.2 | length 1308.2
  Top Layer w12: v1(-925.2,350.39) CELL4.2 ; Q6.2 v1(-649.61,622.05) -623.36,622.05 ; R20.2 -624.01,622.71 -623.36,622.05 ; -555.71,594.49 -555.71,621.45 v1(-555.12,622.05) -623.36,622.05
  Top Layer w15: R1.2 -901.18,283.86 -883.22,301.82 CELL4.2@-883.22,347.1
  Top Layer w16: D12.2@-565.09,566.8 -565.09,585.12 -555.71,594.49 R19.2
  Bottom Layer w12: v3(-971.26,-59.05) -971.26,-10.63 -925.2,35.43 v1(-925.2,350.39) -655.39,620.2 -651.45,620.2 v1(-649.61,622.05)
NetD2_1: CELL3.1 D5.2 R7.2 | length 528.4
  Top Layer w12: CELL3.1 v1(-775.59,23.62) ; -555.71,267.72 v1@-555.71,294.68
  Top Layer w16: D5.2@-565.09,240.03 -565.09,258.34 -555.71,267.72 R7.2
  Bottom Layer w12: v1(-775.59,23.62) -775.59,74.8 v1(-555.12,295.28)
NetD2_2: CELL3.2 J1.4 Q1.2 R2.2 | length 732.4
  Top Layer w12: v3(-971.26,-177.16) -909.45,-177.16 -901.18,-168.9 R2.2 ; Q1.2 v1(-649.61,295.28)
  Top Layer w15: R2.2 -901.18,-42.91 v1(-883.22,-24.95) CELL3.2@-883.22,20.33
  Bottom Layer w15: v1(-883.22,-24.95) -883.22,61.66 v1(-649.61,295.28)
NetD3_1: CELL2.1 D6.2 R9.2 | length 528.4
  Top Layer w12: CELL2.1 v1(-775.59,-303.15) ; -555.71,-59.05 v1@-555.71,-32.09
  Top Layer w16: D6.2@-565.09,-86.74 -565.09,-68.43 -555.71,-59.05 R9.2
  Bottom Layer w12: v1(-775.59,-303.15) -775.59,-251.97 v1(-555.12,-31.5)
NetD3_2: CELL2.2 J1.6 Q2.2 R3.2 | length 1059
  Top Layer w12: v1(-925.2,-303.15) CELL2.2 ; Q2.2 v1(-649.61,-31.5)
  Top Layer w15: R3.2 -901.18,-369.68 -883.22,-351.72 CELL2.2@-883.22,-306.45
  Bottom Layer w12: v3(-1153.54,59.06) -1118.11,23.62 -1118.11,-110.23 v1(-925.2,-303.15) v1@-655.39,-33.34
NetD4_1: CELL1.1 D7.2 R11.2 | length 643.3
  Top Layer w12: CELL1.1 R11.2 ; D7.2 v1(-566.93,-370.08)
  Bottom Layer w12: v1(-566.93,-370.08) -539.37,-397.64 v1(-539.37,-629.92)
NetD4_2: CELL1.2 J1.7 Q3.2 R4.2 | length 1303.9
  Top Layer w12: v1(-925.2,-629.92) CELL1.2 ; Q3.2 v1(-649.61,-358.27)
  Top Layer w15: R4.2 -901.18,-696.46 -883.22,-678.49 CELL1.2@-883.22,-633.22
  Bottom Layer w12: v3(-1153.54,-59.05) -1153.54,-185.04 -980.32,-358.27 -655.39,-358.27 v1(-649.61,-358.27) ; v1(-925.2,-629.92) v1@-655.39,-360.11
NetD5_1: D5.1 Q1.1 R6.2 | length 157.8
  Top Layer w12: Q1.1 -612.2,175.2 -592.52,155.51 D5.1 R6.2@-500,155.51
NetD6_1: D6.1 Q2.1 R8.2 | length 157.8
  Top Layer w12: Q2.1 -612.2,-151.57 -592.52,-171.26 D6.1 R8.2@-500,-171.26
NetD7_1: D7.1 Q3.1 R10.2 | length 157.8
  Top Layer w12: Q3.1 -612.2,-478.35 -592.52,-498.03 D7.1 R10.2@-500,-498.03
NetD8_1: D8.1 Q4.1 R12.2 | length 157.8
  Top Layer w12: Q4.1 -612.2,-805.12 -592.52,-824.8 D8.1 R12.2@-500,-824.8
NetD9_1: CELL6.1 R15.2 | length 196.9
  Top Layer w15: CELL6.1 R15.2
NetD10_1: CELL5.1 D11.2 R17.2 | length 531.6
  Top Layer w12: CELL5.1 v1(-775.59,677.17) ; -555.71,921.26 v1@-555.71,948.82
  Top Layer w16: D11.2 -565.09,893.57 -565.09,911.89 -555.71,921.26 R17.2
  Bottom Layer w12: v1(-775.59,677.17) -555.12,897.64 v1(-555.12,948.82)
NetD10_2: CELL5.2 J1.2 Q5.2 R14.2 | length 1202.1
  Top Layer w12: v1(-925.2,677.16) CELL5.2 ; Q5.2 v1(-649.61,948.82)
  Top Layer w15: R14.2 -901.18,610.63 v1(-892.2,619.61) -883.22,628.59 CELL5.2@-883.22,673.87
  Bottom Layer w12: v3(-971.26,59.06) -971.26,540.55 v1(-892.2,619.61) ; v1(-925.2,677.16) -923.23,677.16 -651.57,948.82 v1(-649.61,948.82)
NetD11_1: D11.1 Q5.1 R16.2 | length 167.8
  Top Layer w12: Q5.1 -647.64,828.74 -637.89,818.99 -637.89,816.08 -630.86,809.06 D11.1 -500,809.06 R16.2
NetD12_1: D12.1 Q6.1 R18.2 | length 166.1
  Top Layer w12: Q6.1 -612.2,501.97 -592.52,482.28 D12.1 -500,482.28 R18.2
NetD16_1: D16.1 R23.1 R24.2 | length 320.3
  Top Layer w10: R23.1 507.87,559.06 515.75,551.18 515.75,432.85 ; D16.1 515.52,433.07 515.75,432.85 ; R24.2 515.75,432.85
NetD17_1: D17.1 D18.1 R31.2 R32.2 | length 1084.9
  Top Layer w12: v1@255.91,-350.24 D18.1 ; v1@370.08,-1079.57 R32.2
  Top Layer w20: D17.1 D18.1 ; R32.2 R31.2
  Bottom Layer w12: v1(256.4,-350.73) 331.04,-350.73 370.08,-389.76 370.08,-854.33 330.71,-893.7 330.71,-1040.2 v1(370.57,-1080.06)
NetD17_2: D17.2 Q10.3 | length 114.2
  Top Layer w12: D17.2 Q10.3
NetD18_2: D18.2 D19.2 PACK-.1 Q9.2 R32.1 | length 1559.8
  Top Layer w12: v1@255.91,-204.57 D18.2 ; v1(369.59,-933.72) 369.59,-888.92 376.62,-881.89 559.06,-881.89 566.93,-889.76 566.93,-1003.35 Q9.2@565.35,-1004.92 ; R32.1 v1@370.08,-934.21
  Top Layer w20: PACK-.1@1358.66,-531.1 1504.03,-531.1 1515.75,-519.39 D19.2
  Bottom Layer w12: v1(256.4,-205.06) 401.57,-350.24 401.57,-901.73 v1(369.59,-933.72)
  other v1: 913.39,-1145.67 952.76,-1145.67 992.13,-1145.67 1031.5,-1145.67 913.39,-1106.3 952.76,-1106.3 992.13,-1106.3 1031.5,-1106.3 1070.87,-1106.3 913.39,-1066.93 952.76,-1066.93 992.13,-1066.93 1031.5,-1066.93 1070.87,-1066.93 913.39,-1027.56 952.76,-1027.56 992.13,-1027.56 1031.5,-1027.56 1070.87,-1027.56 952.76,-988.19 992.13,-988.19 1031.5,-988.19 1070.87,-988.19
NetD19_1: D19.1
NetQ1_3: Q1.3 R1.1 | length 60.4
  Top Layer w12: R1.1 -772.05,212.6 Q1.3
NetQ2_3: Q2.3 R2.1 | length 60.4
  Top Layer w12: R2.1 -772.05,-114.17 Q2.3
NetQ3_3: Q3.3 R3.1 | length 60.4
  Top Layer w12: R3.1 -772.05,-440.94 Q3.3
NetQ4_3: Q4.3 R4.1 | length 60.4
  Top Layer w12: R4.1 -772.05,-767.72 Q4.3
NetQ5_3: Q5.3 R13.1 | length 60.4
  Top Layer w20: R13.1 -772.05,866.14 Q5.3
NetQ6_3: Q6.3 R14.1 | length 43.7
  Top Layer w20: R14.1@-772.05,539.37 Q6.3
NetQ8_1: Q8.1 R30.1 | length 404.3
  Top Layer w20: R30.1 -185.04,-740.16 -24.02,-901.18 Q8.1
NetQ8_2: Q8.2 R26.2 R27.2 R28.1 R29.1 | length 1184.6
  Top Layer w20: R26.2 -145.67,-850.39 -251.97,-744.09 R29.1 -295.37,-667.32 -307.09,-655.61 -307.09,-527.56 39.37,-181.1 R28.1
  other v1: 35.43,-1137.8 74.8,-1137.8 114.17,-1137.8 153.54,-1137.8 192.91,-1137.8 232.28,-1137.8 35.43,-1098.43 74.8,-1098.43 114.17,-1098.43 153.54,-1098.43 192.91,-1098.43 232.28,-1098.43
NetQ8_3: Q8.3 Q9.3
  other v2: 282.48,-666.34 821.85,-666.34 203.74,-665.35 743.11,-665.35 125,-664.37 664.37,-664.37 46.26,-663.39 585.63,-663.39 -32.48,-662.4 506.89,-662.4 283.46,-587.6 822.83,-587.6 204.72,-586.61 744.09,-586.61 125.98,-585.63 665.35,-585.63 47.24,-584.65 586.61,-584.65 -31.5,-583.66 507.87,-583.66 284.45,-508.86 823.82,-508.86 205.71,-507.87 745.08,-507.87 126.97,-506.89 666.34,-506.89 48.23,-505.91 587.6,-505.91 -30.51,-504.92 508.86,-504.92
NetQ9_1: Q9.1 R31.1 | length 101.4
  Top Layer w20: R31.1 507.64,-977.36 515.35,-985.08 Q9.1
NetQ10_2: Q10.2 U1.2 | length 365.4
  Top Layer w10: U1.2 56.02,219.57 87.52,219.57 153.54,153.54 153.54,35.43 198.82,-9.84 Q10.2
NetR29_2: R29.2 R30.2 U1.1 | length 971.5
  Top Layer w10: R29.2 R30.2 v1(-185.04,-541.34) ; v1(55.12,133.86) U1.1@55.12,196.85
  Bottom Layer w10: v1(-185.04,-541.34) -185.04,-405.51 55.12,-165.35 v1(55.12,133.86)
NetR33_1: R33.1 SW2.1 | length 322.8
  Top Layer w14: R33.1 SW2.1
NetR35_1: R35.1 U1.4 U2.43 U3.6 | length 1146.5
  Top Layer w10: U1.4 56.02,258.94 87.52,258.94 177.17,169.29 177.17,78.74 214.57,41.34 R35.1 v1(590.55,41.34) U2.43 ; U3.6 v1(440.94,-246.06)
  Bottom Layer w10: v1(440.94,-246.06) 440.94,-200.79 590.55,-51.18 v1(590.55,41.34)
NetR36_1: R36.1 U1.5 U2.42 U3.1 | length 1251.9
  Top Layer w10: U1.5 110.24,279.53 v1(141.73,248.03) ; U3.1 U3.1@387.87,-303.15 ; v1(387.87,-246.06) U3.1@387.87,-303.15 ; U3.1@388.78,-302.24 U3.1@387.87,-303.15 ; R36.1 v1(590.55,102.36) 590.55,78.74 608.27,61.02 U2.42
  Bottom Layer w10: v1(141.73,248.03) 275.59,114.17 275.59,110.24 283.46,102.36 v1(590.55,102.36) 387.87,-100.32 v1@387.87,-246.92
NetR37_2: R37.2 SB3.1 U4.5 U4.8 | length 524.3
  Top Layer w12: R37.2 712.6,547.24 724.41,559.06 U4.8 787.2,507.03 815.89,478.35 SB3.1 984.25,547.24 972.44,559.06 U4.5
NetSB1_1: SB1.1 SB2.2 U2.44 | length 286.3
  Top Layer w10: SB1.1 SB2.2 588.63,-98.43 594.49,-92.57 594.49,8.75 607.39,21.65 U2.44
NetU2_32: U2.32 U4.4 | length 252.6
  Top Layer w10: U2.32 789.37,252.02 812.94,275.59 921.26,275.59 937.2,291.54 U4.4
NetU2_33: U2.33 U4.1 | length 135.2
  Top Layer w10: U2.33 769.68,273.62 787.2,291.14 U4.1
SWCLK: J5.2 U2.37 | length 583.8
  Top Layer w10: U2.37 687.01,159.45 v1(748.03,98.43)
  Bottom Layer w12: v1(748.03,98.43) 1070.87,-224.41 J5.2
SWDIO: J5.3 U2.34 | length 643.3
  Top Layer w10: v1(750,161.42) U2.34
  Bottom Layer w10: v1(750,161.42) 790.55,161.42 J5.3
pads on no net: "CAN BUS." J1. U2.1 U2.2 U2.3 U2.4 U2.5 U2.6 U2.10 U2.11 U2.12 U2.13 U2.14 U2.15 U2.16 U2.17 U2.18 U2.19 U2.21 U2.22 U2.25 U2.26 U2.27 U2.28 U2.29 U2.30 U2.31 U2.39 U2.40 U2.41 U2.45 U2.46 U3.3
copper on no net: | length 0
  other v1: -299.21,-1173.23 -251.97,-1173.23 -204.72,-1173.23 -299.21,-1125.98 -251.97,-1125.98 -204.72,-1125.98 -299.21,-1078.74 -251.97,-1078.74 -204.72,-1078.74 -299.21,-1011.81 -251.97,-1011.81 -204.72,-1011.81 -299.21,-964.57 -251.97,-964.57 -204.72,-964.57 -299.21,-917.32 -251.97,-917.32 -204.72,-917.32

## Polygon pours and split planes (outlines as drawn)
GND on Top Layer "Top Layer-GND" (solid, remove dead copper, pour order 9): -433.07,-925.2 -137.8,-629.92 -137.8,-413.39 -118.11,-393.7 1633.86,-393.7 1633.86,1240.16 -925.2,1240.16 -925.2,-901.57 -901.57,-925.2
GND on Top Layer "GND_L01_P003" (solid, remove dead copper, pour order 3): -334.65,-964.57 -472.44,-964.57 -964.57,-964.57 -984.25,-944.88 -984.25,1240.16 -1633.86,1240.16 -1633.86,-1240.16 -334.65,-1240.16
GND on Bottom Layer "Bottom Layer-GND" (solid, remove dead copper, pour order 8): -433.07,-925.2 -137.8,-629.92 -137.8,-413.39 -118.11,-393.7 1633.86,-393.7 1633.86,1240.16 -925.2,1240.16 -925.2,-901.57 -901.57,-925.2
GND on Bottom Layer "GND_L02_P000" (solid, remove dead copper, pour order 0): -334.65,-964.57 -472.44,-964.57 -964.57,-964.57 -984.25,-944.88 -984.25,1240.16 -1633.86,1240.16 -1633.86,-1240.16 -334.65,-1240.16

## Keep-outs
Keep-Out Layer:
  circle w78.74: c1437.01,1043.31 r78.74
  circle w78.74: c-1437.01,1043.31 r78.74
  circle w78.74: c1437.01,-1043.31 r78.74
  circle w78.74: c-1437.01,-1043.31 r78.74
  lines w15.75: -1633.86,-1043.31 ccw(c-1437.01,-1043.31) -1437.01,-1240.16 1437.01,-1240.16 ccw(c1437.01,-1043.31) 1633.86,-1043.31 1633.86,1043.31 ccw(c1437.01,1043.31) 1437.01,1240.16 -1437.01,1240.16 ccw(c-1437.01,1043.31) -1633.86,1043.31 -1633.86,-1043.31

## Other copper
Top Layer:
  rectangle net NetC2_2: -200.79,303.15 -145.67,334.65
  rectangle net NetC19_1: -82.68,-23.62 -43.31,-7.87
  rectangle net NetC11_1: -212.6,35.43 -177.16,51.18
  rectangle net NetC20_2: -15.75,35.43 94.49,51.18
  rectangle net NetD10_2: -994.88,39.37 -951.57,78.74
  rectangle net NetD1_2: -994.88,-78.74 -951.57,-39.37
  rectangle net NetD2_2: -994.88,-196.85 -951.57,-157.48
  rectangle net NetD4_2: -1177.17,-78.74 -1133.86,-39.37
  rectangle net NetD3_2: -1177.17,39.37 -1133.86,78.74
  region net NetD18_2: 555.12,-948.82 880.58,-948.82 996.06,-837.06 996.06,-531.4 1062.99,-476.38 1358.27,-476.38 1417.32,-527.56 1417.32,-885.83 1062.99,-1200.79 629.92,-1200.79 555.12,-1118.11
  region net NetC3_2: -448.82,-401.57 -421.26,-401.57 -421.26,-696.85 -448.82,-696.85
  region net NetC2_2: -448.82,7.87 -421.26,7.87 -421.26,-153.54 -448.82,-153.54
  region net NetC1_2: -448.82,334.65 -421.26,334.65 -421.26,177.17 -448.82,177.17
  region net NetC6_2: -448.82,988.19 -421.26,988.19 -421.26,692.91 -448.82,692.91
  region net NetQ8_2: -110.24,-905.51 -90.55,-925.2 -90.55,-1070.87 -78.74,-1082.68 11.81,-1082.68 11.81,-944.88 287.4,-944.88 287.4,-1161.42 259.84,-1188.98 -157.48,-1188.98 -165.35,-1181.1 -165.35,-909.45 -161.42,-905.51
  region net NetC17_1: 117.02,440.94 157.48,440.94 157.48,433.07 117.02,433.07
  region net NetC17_1: 27.56,417.32 27.56,397.64 82.68,397.64 82.68,417.32
  region net NetC7_2: 291.34,395.67 291.34,368.11 173.23,368.11 173.23,395.67
  region net NetQ8_3: 334.65,-444.88 456.69,-444.88 456.69,-728.35 334.65,-728.35
  region net NetC6_2: -200.79,456.69 -200.79,417.32 -145.67,417.32 -145.67,456.69
  region net NetC30_1: -1122.05,157.48 -1102.36,137.8 -1003.94,137.8 -984.25,157.48 -984.25,866.14 -1023.62,905.51 -1397.64,905.51 -1437.01,866.14 -1437.01,492.13 -1397.64,452.76 -1181.1,452.76 -1122.05,393.7
Bottom Layer:
  rectangle net NetQ8_3: -86.61,-746.06 338.58,-425.2
  rectangle net NetQ8_3: 452.76,-746.06 877.95,-425.2
  region net NetQ8_2: -110.24,-905.51 -90.55,-925.2 -90.55,-1070.87 -78.74,-1082.68 7.87,-1082.68 19.68,-1070.87 19.68,-944.88 287.4,-944.88 287.4,-1161.42 259.84,-1188.98 -157.48,-1188.98 -165.35,-1181.1 -165.35,-909.45 -161.42,-905.51
  region net NetD18_2: 555.12,-948.82 880.97,-948.82 996.06,-837.44 996.06,-531.4 1062.99,-476.38 1358.27,-476.38 1417.32,-527.56 1417.32,-885.83 1062.99,-1200.79 629.92,-1200.79 555.12,-1118.11

## Silkscreen, mask and mechanical layers (free items; w line width, h text height)
Top Overlay:
  lines w7.87: -1614.17,417.32 -1535.43,417.32 ; -1614.17,496.06 -1535.43,496.06 ; -1614.17,574.8 -1533.47,574.8 ; -1574.8,338.58 -1574.8,654.53 ; -1535.43,338.58 -1614.17,338.58 -1614.17,654.53 -1535.43,654.53 ; -1533.47,338.58 -1533.47,654.53 ; 1311.02,480.31 1169.29,480.31 1090.55,480.31 1090.55,303.15 1169.29,303.15 ; 1169.29,303.15 1169.29,657.48 1311.02,657.48 1311.02,303.15 1169.29,303.15
  text "GND" at -1605.7,647.94 h35 r270
  text "C6" at -1566.33,633.39 h35 r270
  text "C2" at -1605.71,553.43 h35 r270
  text "C5" at -1566.33,553.75 h35 r270
  text "LOAD" at 1303.15,482.28 h60 r90
  text "C4" at -1566.34,476.11 h35 r270
  text "C1" at -1605.71,473.9 h35 r270
  text "GND" at -1605.7,410.74 h35 r270
  text "C3" at -1566.33,396.06 h35 r270
  text "MODE" at 1161.42,303.15 h60 r90
  text "CHG" at 1303.15,301.18 h60 r90
  text "3V3" at 957.44,-319.82 h30 r20
  text "GND" at 1252.14,-321.89 h30 r20
  text "SWDIO" at 1137.17,-327.33 h30 r20
  text "SWCLK" at 1033.2,-328.78 h30 r20
  text "MAX 30A" at 1587.24,-821.1 h70 r90
  text "Battery Management System V2.0" at -1312.99,-1073.01 h75
  text "Designed By Alperen FENERCİ" at -1312.65,-1137.52 h50
Bottom Overlay:
  drawing of 13 lines, arcs and shapes, not listed
  text "CONNECT FROM THE LOWEST CELL AND SET THE MODE" at -1659.08,-511.14 h20 r270